# Altium PCB Template.PcbDoc
Units mil, origin at the board's own origin, x right, y up, seen from the top; angles counter-clockwise.
Board outline 6000 x 4000 mil, 2 copper layers (Top Layer, Bottom Layer), stack 61.2 mil thick; 5 components, 0 nets, 0 pads, 4 vias.
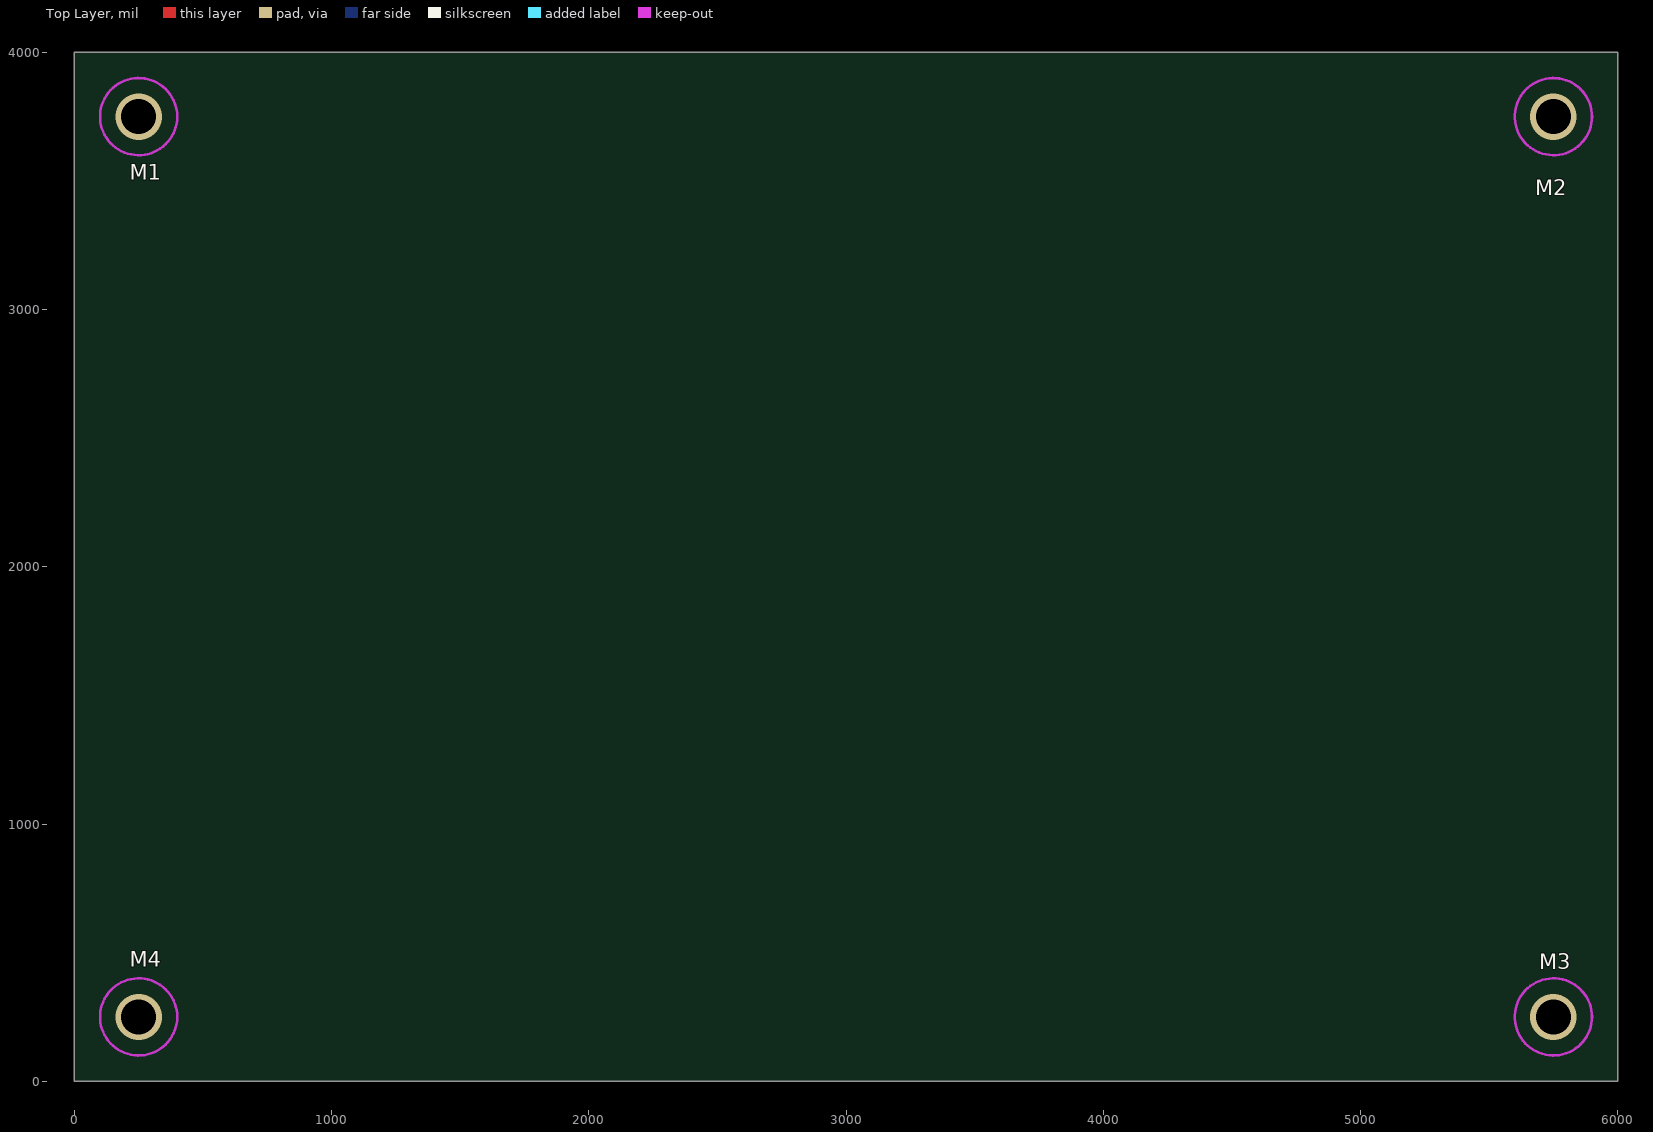
[diagram p0: Top Layer view]
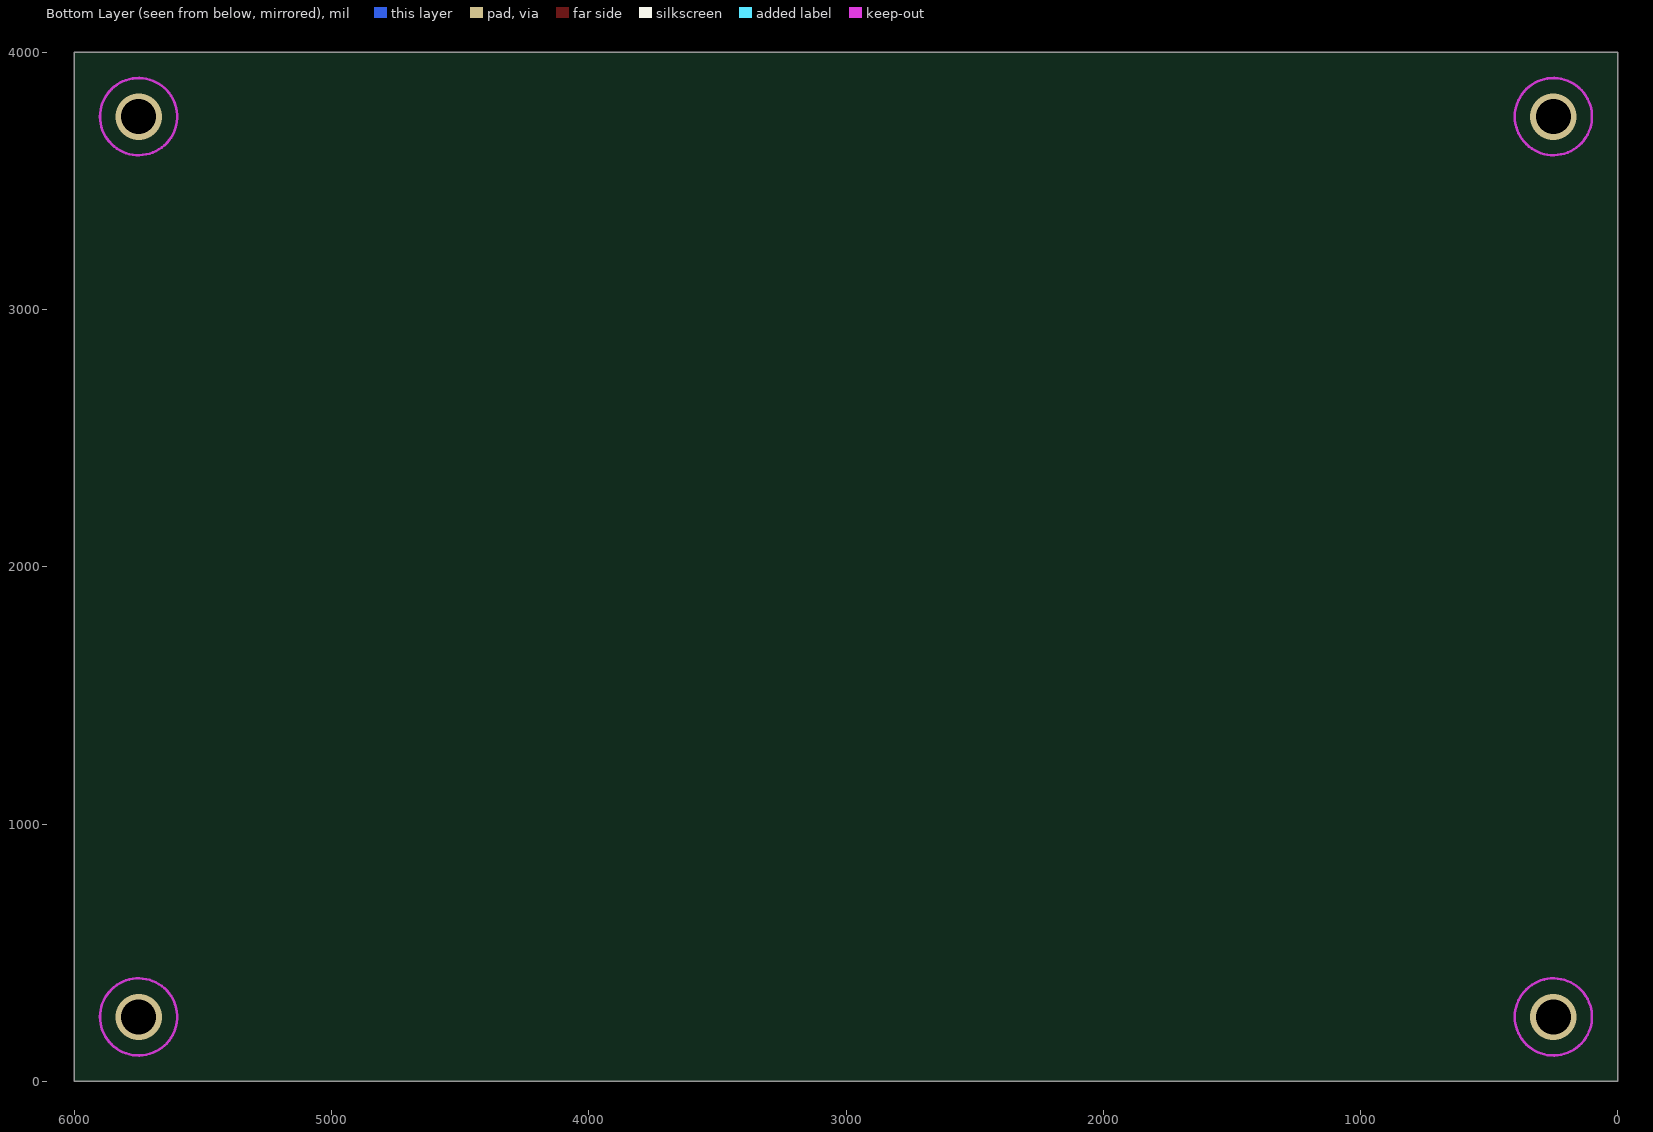
[diagram p1: Bottom Layer view, seen from below]

## Layer stack, top to bottom
Top Solder: solder mask 0.4, Solder Resist, Dk 3.5
Top Layer: signal copper 1.4
Dielectric 1: dielectric 58.4, FR-4, Dk 4.8
Bottom Layer: signal copper 1.4
Bottom Solder: solder mask 0.4, Solder Resist, Dk 3.5

## Board outline
0,0 6000,0 6000,4000 0,4000

## Design rules (kind name [scope] priority, off if disabled: settings)
Clearance [All] p1: gap=5 ignorepadtopadclearanceinfootprint=FALSE except(0: Arc-Hole Track-Hole SMDPad-Hole THPad-Hole Via-Hole Fill-Hole Poly-Hole Region-Hole Text-Hole)
HoleSize [All] p1: absolutevalues=TRUE maxlimit=150 minlimit=20 maxpercent=80.000 minpercent=20.000
MinimumAnnularRing [All] p1: minimumring=10
MinimumSolderMaskSliver [All] p1: minsoldermaskwidth=3
PolygonConnect [All] p1: connectstyle=Relief reliefconductorwidth=10 reliefentries=4 polygonreliefangle="90 Angle" airgapwidth=10
RoutingVias [All] p1: holewidth=20 width=30 viastyle="Through Hole" minholewidth=20 minwidth=30 maxholewidth=40 maxwidth=50
SolderMaskExpansion [All] p1: expansion=5
Width Width_1 [All] p1: maxlimit=10 minlimit=10 preferedwidth=10
28 further rules are at their usual default settings.

## Components (designator, comment, footprint, x,y, rotation, side; value= is the part's Value field where it differs from the comment)
M1 "MOUNTING_HOLE" MOUNTING_HOLE 250,3750 r0 top locked
M2 "MOUNTING_HOLE" MOUNTING_HOLE 5750,3750 r0 top locked
M3 "MOUNTING_HOLE" MOUNTING_HOLE 5750,250 r0 top locked
M4 "MOUNTING_HOLE" MOUNTING_HOLE 250,250 r0 top locked
M5 "Nucleo-64" NUCLEO_64 340,6540 r0 top

## Footprints (in the part's own frame and the unit in brackets; to place one, negate y for a bottom-side part, rotate by r counter-clockwise, add the part's x,y. Pads: shape width x height; smd on the part's side, far side on the other; paste and mask are expansions set on the pad)
MOUNTING_HOLE [mil]
  Keep-Out Layer circle w10: c0,0 r150
NUCLEO_64 [mil] "Nucleo 64 Placeholder"
  body extent -128,-1998 2628,1269, height 394

## Part data
M1 M2 M3 M4: "Mounting Hole"
M5: "Nucleo-64 Board Model"

## Via types
v1: diameter 180, hole 136, Top Layer to Bottom Layer, 4 vias

## Nets (pads, with @x,y where several pads share a name; then routed paths per layer and width w, separated by ;. In a path a pad name is that pad's centre, name@x,y a point inside that pad or via, vN(x,y) a via of type N, cw(c..) or ccw(c..) an arc to the next point about the centre after c; other vN are vias at no path point)
copper on no net:
  other v1: 250,250 5750,250 250,3750 5750,3750

## Silkscreen, mask and mechanical layers (free items; w line width, h text height)
Outline:
  the board outline again, w10
Drill Drawing:
  drawing of 205 lines, arcs and shapes, not listed
  text "Layer" at 6299.79,4963.59 h60
  text "Name" at 6709.7,4963.59 h60
  text "Material" at 7639.44,4963.59 h60
  text "Thickness" at 8499.21,4963.59 h60
  text "Constant" at 9149.05,4963.59 h60
  text "Board Layer Stack" at 9718.91,4963.59 h60
  text "1" at 6299.79,4843.59 h60
  text "Top Overlay" at 6709.7,4843.59 h60
  text "2" at 6299.79,4723.59 h60
  text "Top Solder" at 6709.7,4723.59 h60
  text "Solder Resist" at 7639.44,4723.59 h60
  text "0.40mil" at 8499.21,4723.59 h60
  text "3.5" at 9149.05,4723.59 h60
  text "3" at 6299.79,4603.59 h60
  text "Top Layer" at 6709.7,4603.59 h60
  text "Copper" at 7639.44,4603.59 h60
  text "1.40mil" at 8499.21,4603.59 h60
  text "4" at 6299.79,4483.59 h60
  text "Dielectric 1" at 6709.7,4483.59 h60
  text "FR-4" at 7639.44,4483.59 h60
  text "58.40mil" at 8499.21,4483.59 h60
  text "4.8" at 9149.05,4483.59 h60
  text "5" at 6299.79,4363.59 h60
  text "Bottom Layer" at 6709.7,4363.59 h60
  text "Copper" at 7639.44,4363.59 h60
  text "1.40mil" at 8499.21,4363.59 h60
  text "6" at 6299.79,4243.59 h60
  text "Bottom Solder" at 6709.7,4243.59 h60
  text "Solder Resist" at 7639.44,4243.59 h60
  text "0.40mil" at 8499.21,4243.59 h60
  text "3.5" at 9149.05,4243.59 h60
  text "7" at 6299.79,4123.59 h60
  text "Bottom Overlay" at 6709.7,4123.59 h60
  text "Symbol" at 6346.31,1905 h72
  text "Hit Count" at 6852.19,1905 h72
  text "Finished Hole Size" at 7550,1905 h72
  text "Plated" at 8895.6,1905 h72
  text "Hole Type" at 9401.48,1905 h72
  text "4" at 6852.19,1755 h60
  text "136.00mil (3.454mm)" at 7550,1755 h60
  text "PTH" at 8895.6,1755 h60
  text "Round" at 9401.48,1755 h60
  text "4 Total" at 6852.19,1605 h60

## Dimensions
0,4000 to 6000,4000 on Drill Drawing
0,4000 to 0,0 on Drill Drawing